# Altium PCB cpuPCB-v6.PcbDoc (part 3 of 3)
Units mil, origin at the board's own origin, x right, y up, seen from the top; angles counter-clockwise.
Board outline 3900 x 3900 mil, 2 copper layers (Top Layer, Bottom Layer); 139 components, 120 nets, 548 pads, 249 vias.
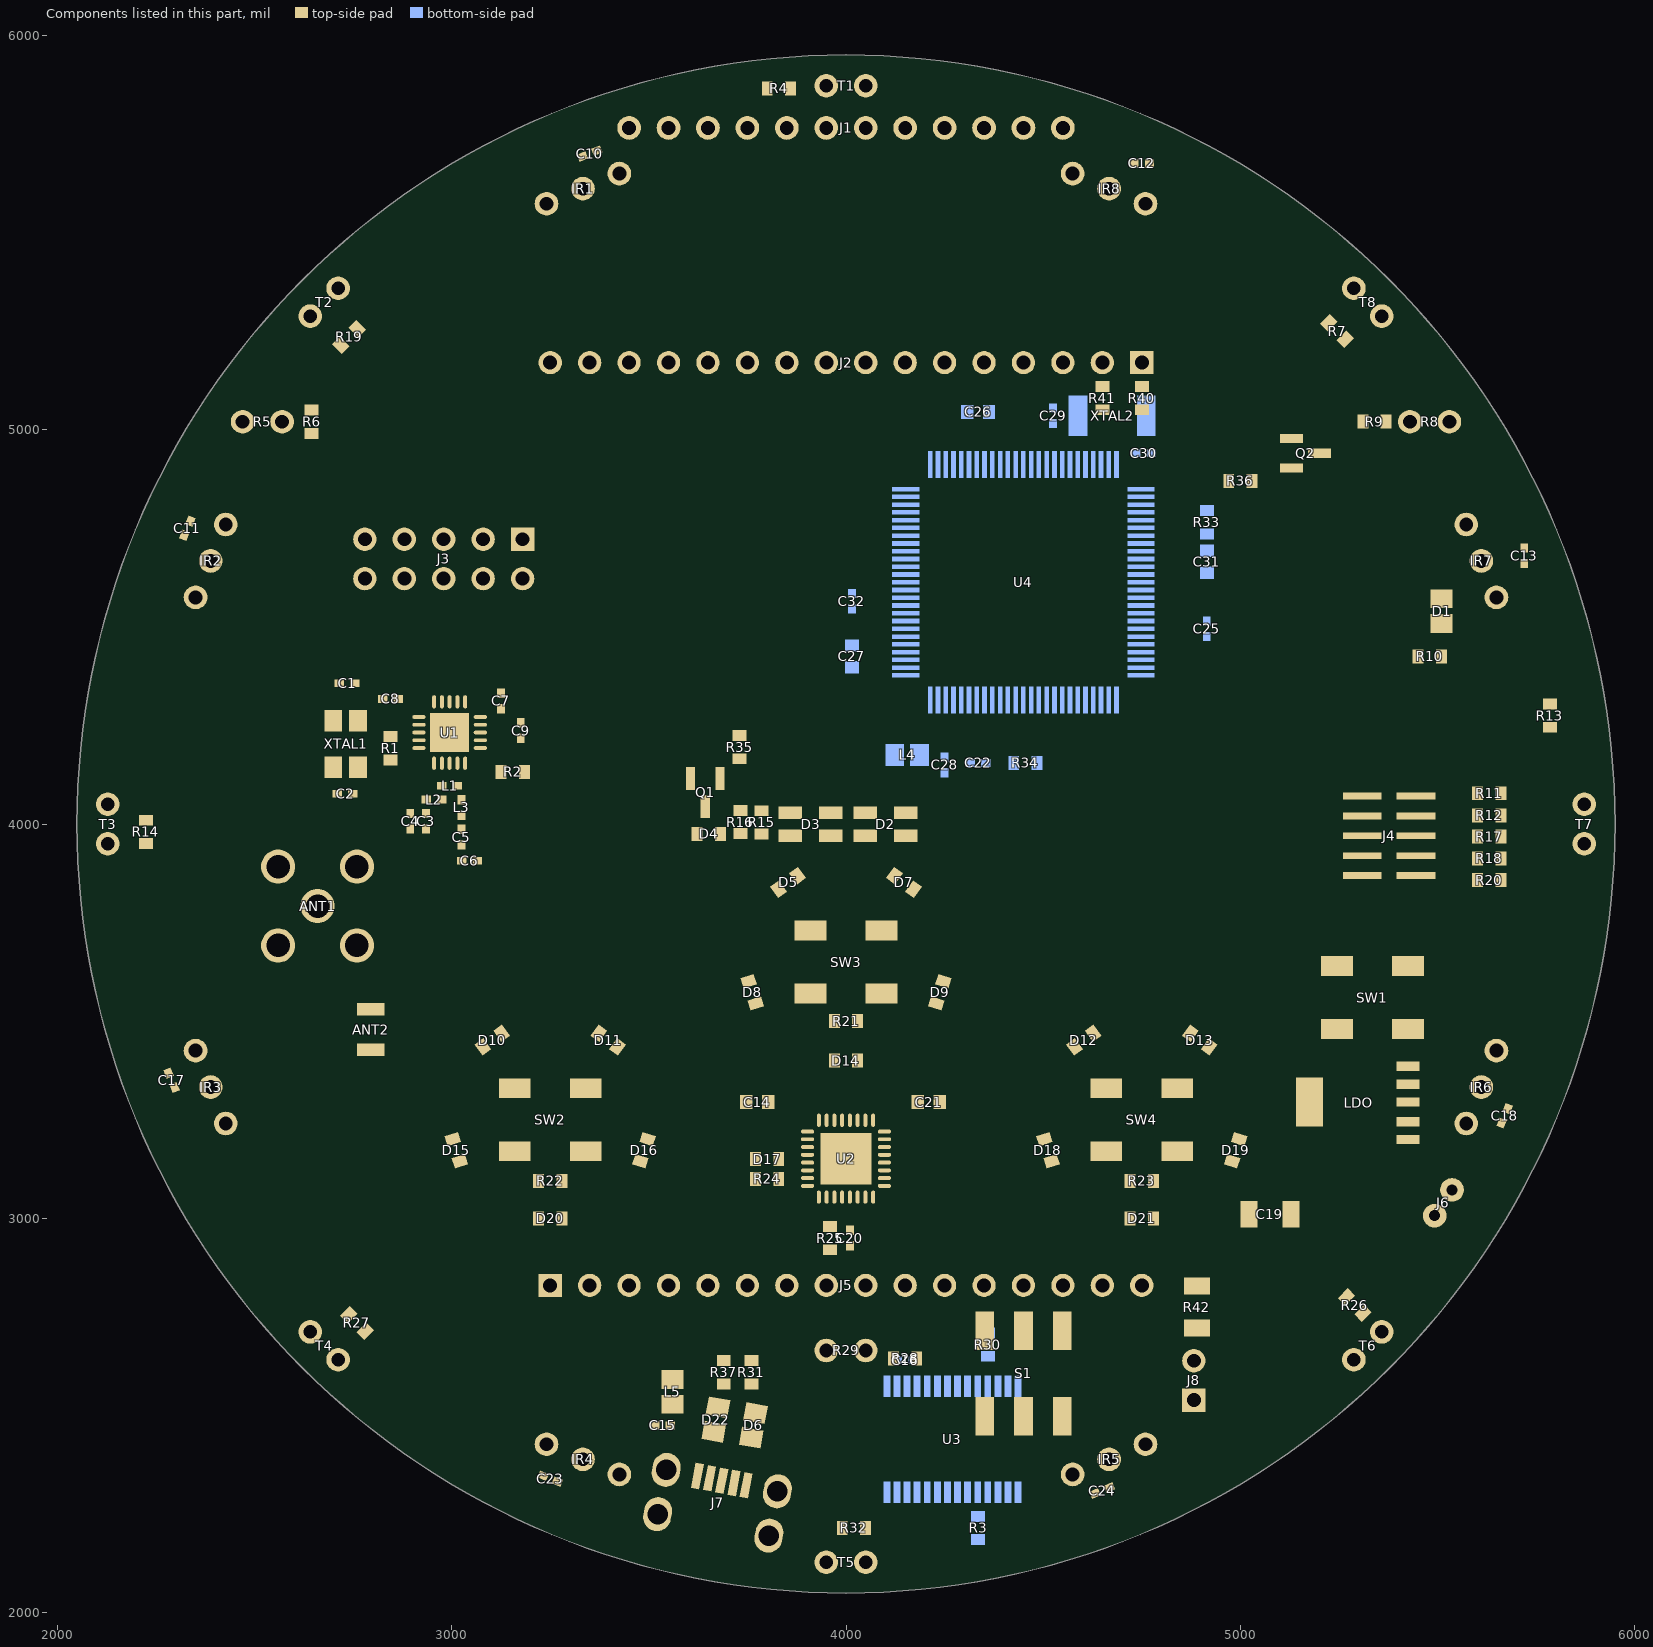
[diagram p3: the components of this part, seen from the top]

## Silkscreen, mask and mechanical layers (free items; w line width, h text height) (continued)
Bottom Overlay:
  text "8962-CPU" at 5377,4206 h90
  text "FTDI" at 4039,2520 h90
Mechanical 1:
  lines w5: 2000,4000 6000,4000 ; 4000,2000 4000,6000

## Text inside footprints (layer, text, board x,y; h text height)
J3: Top Overlay "1" at 3260,4705 h45